# EAGLE board Color2018-DESKTOP-QOJ183D (EAGLE 9.0.1)
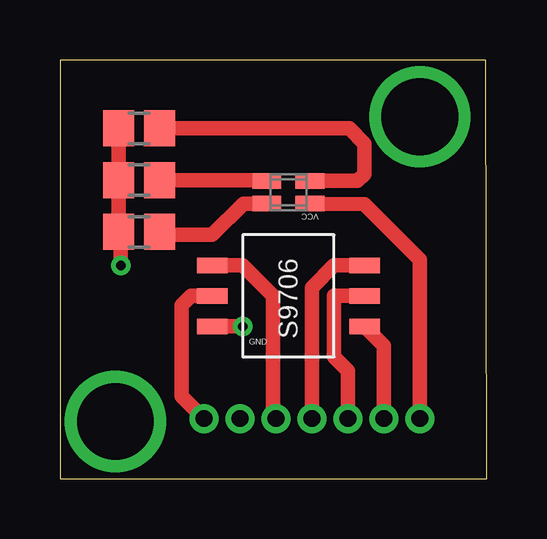
[diagram p0: board, top side]
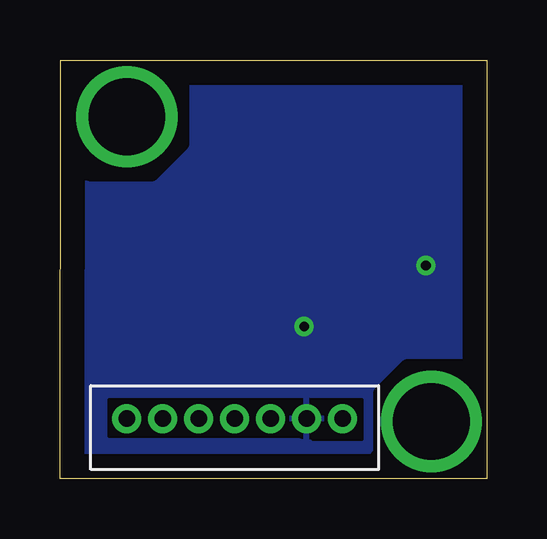
[diagram p1: board, bottom side, seen from below]

Size 17.8 x 17.45 mm. Coordinates in mm from the lower left corner, seen from the top.
Outline: 0,0 17.8,0 17.76,17.45 0,17.45 0,0
Copper layers (1*16): Top 0.035mm / dielectric 1.5mm / Bottom 0.035mm
Design rules "default": minimum track width 6mil, minimum drill 0.35mm, track to track 6mil, track to pad 6mil, pad to pad 6mil, via to via 6mil, smd to smd 6mil, copper to edge 40mil, drill to drill 6mil, minimum pad ring 10mil, minimum via ring 8mil, stop-mask expansion 4mil, vias tented up to drill 0mil, thermal gap 10mil
bRestrict: 13 lines

## Footprints (pad centres in the part's own frame; a part is rotated, then mirrored left to right if it is on the bottom)
B7B-ZR = drill 0.7: 1 10.5,-1.3; 2 9,-1.3; 3 7.5,-1.3; 4 6,-1.3; 5 4.5,-1.3; 6 3,-1.3; 7 1.5,-1.3
GM1WA55311A = smd 0.65 x 1.2: 1 -0.475,0.9; 2 -0.475,-0.9; 3 0.475,-0.9; 4 0.475,0.9
R0805 = smd 1.3 x 1.5: 1 -0.85,0; 2 0.85,0
S9706 = smd 1.27 x 0.635: CK 7.62,3.81; DOUT 1.27,5.08; GATE 7.62,5.08; GND 1.27,2.54; RANGE 7.62,2.54; VDD 1.27,3.81

## Placement (x,y rotation side)
CN2  COLOR-ZH-M  [B7B-ZR]  16.51,3.81 0 bottom
LED1  GM1WA55311A  [GM1WA55311A]  9.53,11.94 270 top
R1  330  [R0805]  3.3,12.45 0 top
R5  330  [R0805]  3.3,10.29 0 top
R6  330  [R0805]  3.3,14.61 0 top
U$1  S9706  [S9706]  5.08,3.81 0 top

## Library data of the parts
CN2 = jst
LED1 = led
R1 R5 R6 = 0@Mylibrary-main1
U$1 = S9706

## Nets
+3V3: CN2.1 U$1.VDD
+5V: CN2.7 LED1.4
CK: CN2.5 U$1.CK
DOUT: CN2.3 U$1.DOUT
GATE: CN2.4 U$1.GATE
GND: CN2.2 R1.1 R5.1 R6.1 U$1.GND
N$1: LED1.2 R1.2
N$2: LED1.3 R5.2
N$3: LED1.1 R6.2
RANGE: CN2.6 U$1.RANGE

## Tracks (layer width: path | path; a pad name or v marks a point on that pad's centre or on a via)
+3V3
  Top 0.61: U$1.VDD 5.46,7.62 5.08,7.24 5.08,3.44 CN2.1
+5V
  Top 0.61: LED1.4 12.7,11.43 15.01,9.12 CN2.7
CK
  Top 0.61: U$1.CK 11.43,7.62 11.43,5.08 12.01,4.5 CN2.5
DOUT
  Top 0.61: U$1.DOUT 7.62,8.89 8.89,7.62 8.89,2.63 CN2.3
GATE
  Top 0.61: U$1.GATE 11.43,8.89 10.51,7.97 CN2.4
GND  (via drill 0.4)
  Top 0.61: U$1.GND v7.62,6.35 | R6.1 R1.1 R5.1 2.54,10.2 v2.54,8.89
  pour Bottom: 0,17.78 17.78,17.78 17.78,0 0,0
N$1
  Top 0.61: R1.2 8.59,12.45 LED1.2
N$2
  Top 0.61: LED1.3 7.65,11.46 6.35,10.16 4.28,10.16 R5.2
N$3
  Top 0.61: LED1.1 12.41,12.41 12.7,12.7 12.7,13.97 12.06,14.61 R6.2
N$4  (via drill 3.2 pad 0.25)
  other vias: 2.31,2.39
N$45  (via drill 3.2 pad 0.25)
  other vias: 15.01,15.09
RANGE
  Top 0.61: CN2.6 13.51,5.54 U$1.RANGE

## Text on the board
tNames: VCC | GND